# Altium PCB smd_breakout.PcbDoc
Units mm, origin at the board's own origin, x right, y up, seen from the top; angles counter-clockwise.
Board outline 152.4 x 101.6 mm, 2 copper layers (Top Layer, Bottom Layer); 24 components, 0 nets, 106 pads, 0 vias.
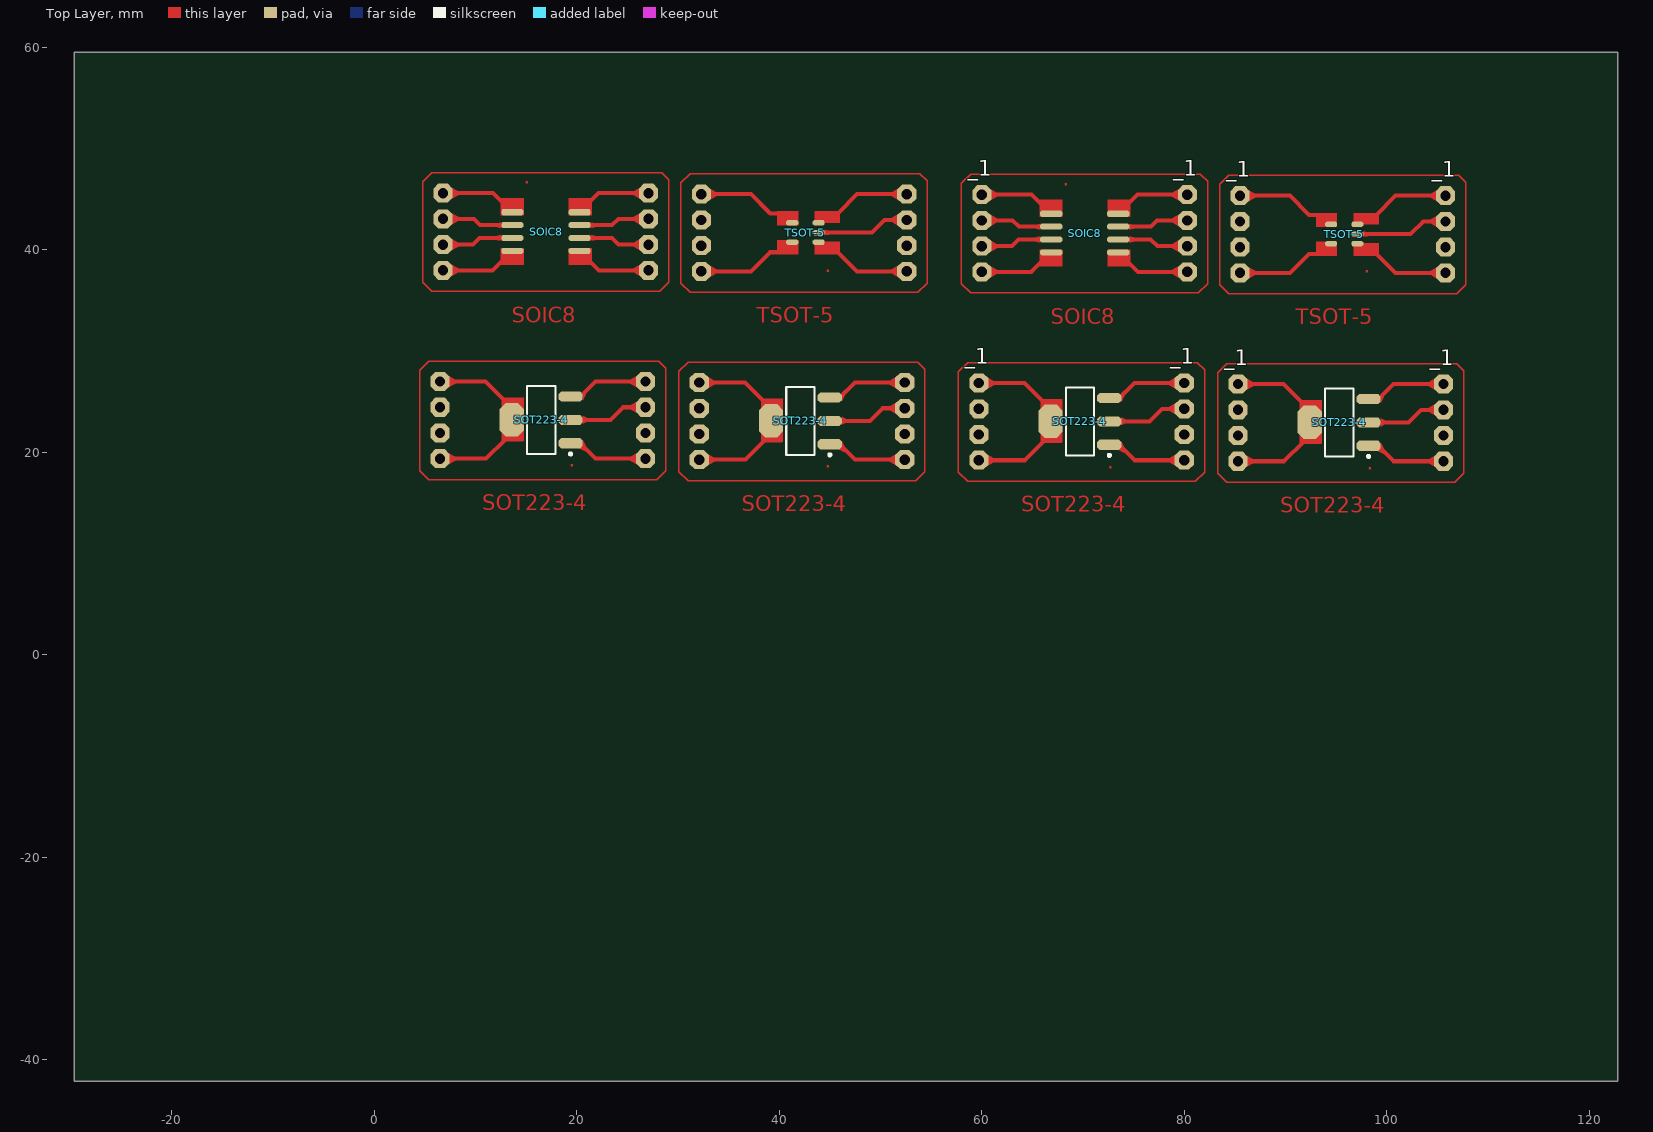
[diagram p0: Top Layer view]
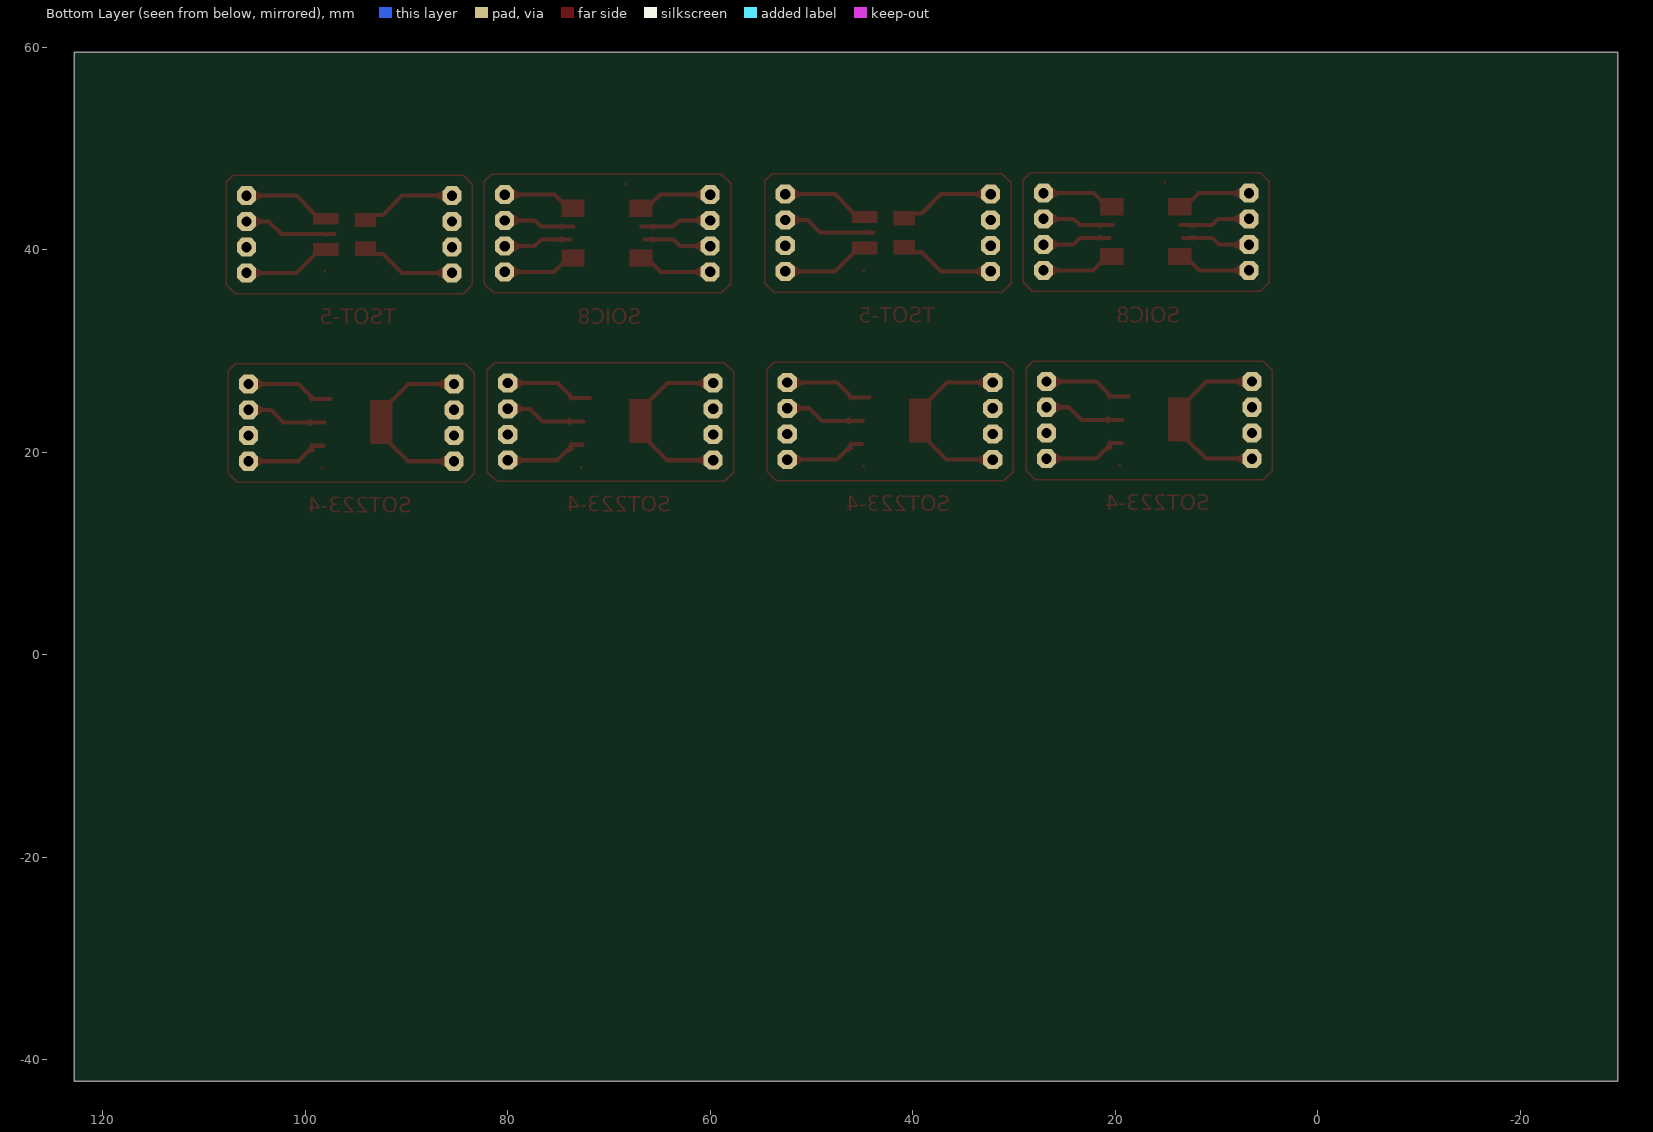
[diagram p1: Bottom Layer view, seen from below]

## Layer stack, top to bottom
Top Solder: solder mask 0.0102, Solder Resist, Dk 3.5
Top Layer: signal copper 0.0356
Dielectric 1: dielectric 0.32, FR-4, Dk 4.8
Bottom Layer: signal copper 0.0356
Bottom Solder: solder mask 0.0102, Solder Resist, Dk 3.5

## Board outline
-29.6,-42.1 122.8,-42.1 122.8,59.5 -29.6,59.5

## Design rules (kind name [scope] priority, off if disabled: settings)
Clearance [All] p1: gap=0.254 ignorepadtopadclearanceinfootprint=FALSE except(0: Arc-Hole Track-Hole SMDPad-Hole THPad-Hole Via-Hole Fill-Hole Poly-Hole Region-Hole Text-Hole)
PolygonConnect [All] p1: connectstyle=Relief reliefconductorwidth=0.254 reliefentries=4 polygonreliefangle="90 Angle" airgapwidth=0.254
RoutingVias [All] p1: holewidth=0.711 width=1.27 viastyle="Through Hole" minholewidth=0.711 minwidth=1.27 maxholewidth=0.711 maxwidth=1.27
SolderMaskExpansion [All] p1: expansion=0.102
Width [All] p1: maxlimit=0.254 minlimit=0.254 preferedwidth=0.254
30 further rules are at their usual default settings.

## Components (designator, comment, footprint, x,y, rotation, side; value= is the part's Value field where it differs from the comment)
_1 "Comment" 1X04 60.01,37.82 r90 top
_1 "Comment" 1X04 80.3,37.82 r90 top
_1 "Comment" 1X04 105.8,37.72 r90 top
_1 "Comment" 1X04 85.51,37.72 r90 top
_1 "Comment" 1X04 59.71,19.22 r90 top
_1 "Comment" 1X04 80,19.22 r90 top
_1 "Comment" 1X04 105.6,19.12 r90 top
_1 "Comment" 1X04 85.31,19.12 r90 top
SOIC8 "Comment" SOIC8_208MIL 70.18,41.65 r270 top
SOIC8 "Comment" SOIC8_208MIL 16.98,41.8 r270 top
SOT223-4 "Comment" SOT223_N 69.7,23.05 r180 top
SOT223-4 "Comment" SOT223_N 95.3,22.95 r180 top
SOT223-4 "Comment" SOT223_N 42.1,23.1 r180 top
SOT223-4 "Comment" SOT223_N 16.5,23.2 r180 top
TSOT-5 "Comment" SOT23-5L 95.8,41.55 r90 top
TSOT-5 "Comment" SOT23-5L 42.6,41.7 r90 top
? "Comment" 1X04 32.11,19.27 r90 top
? "Comment" 1X04 52.4,19.27 r90 top
? "Comment" 1X04 26.8,19.37 r90 top
? "Comment" 1X04 6.51,19.37 r90 top
? "Comment" 1X04 32.31,37.87 r90 top
? "Comment" 1X04 52.6,37.87 r90 top
? "Comment" 1X04 27.1,37.97 r90 top
? "Comment" 1X04 6.81,37.97 r90 top

## Footprints (in the part's own frame and the unit in brackets; to place one, negate y for a bottom-side part, rotate by r counter-clockwise, add the part's x,y. Pads: shape width x height; smd on the part's side, far side on the other; paste and mask are expansions set on the pad)
1X04 [mil]
  oct 74x74 hole 40: 1(0,0) 2(100,0) 3(200,0) 4(300,0)
SOIC8_208MIL [mm]
  oct 0.6x2.2 smd: 1(-1.905,-3.315) 2(-0.635,-3.315) 3(0.635,-3.315) 4(1.905,-3.315) 5(1.905,3.315) 6(0.635,3.315) 7(-0.635,3.315) 8(-1.905,3.315)
SOT23-5L [mm]
  oct 0.55x1.2 smd: 1(-0.95,-1.3) 2(0,-1.3) 3(0.95,-1.3) 4(0.95,1.3) 5(-0.95,1.3)
SOT223_N [mm] "SOT223, 4-Leads, Body 6.5x3.5mm, Pitch 2.3mm, Lead Span 7mm, IPC Medium Density"
  oct 2.4x1 smd: 1(-2.9,2.3) 2(-2.9,0) 3(-2.9,-2.3)
  oct 2.4x3.3 smd: 4(2.9,0)
  silkscreen extent -3.03,-3.35 1.4,3.47, body extent -1.85,-3.35 1.85,3.35, height 1.7

## Nets (pads, with @x,y where several pads share a name; then routed paths per layer and width w, separated by ;. In a path a pad name is that pad's centre, name@x,y a point inside that pad or via, vN(x,y) a via of type N, cw(c..) or ccw(c..) an arc to the next point about the centre after c; other vN are vias at no path point)
pads on no net: ?.1 ?.2 ?.3 ?.4 _1.1 _1.2 _1.3 _1.4 SOIC8.1 SOIC8.2 SOIC8.3 SOIC8.4 SOIC8.5 SOIC8.6 SOIC8.7 SOIC8.8 SOT223-4.1 SOT223-4.2 SOT223-4.3 SOT223-4.4 TSOT-5.1 TSOT-5.2 TSOT-5.3 TSOT-5.4 TSOT-5.5
copper on no net: | length 930.4
  Top Layer w0.128: 4.5,18.2 4.5,28.1 5.4,29 28.1,29 28.8,28.3 28.8,18.2 27.9,17.3 5.4,17.3 4.5,18.2 ; 4.8,36.8 4.8,46.7 5.7,47.6 28.4,47.6 29.1,46.9 29.1,36.8 28.2,35.9 5.7,35.9 4.8,36.8 ; 30.1,18.1 31,17.2 53.5,17.2 54.4,18.1 54.4,28.2 53.7,28.9 31,28.9 30.1,28 30.1,18.1 ; 30.3,36.7 31.2,35.8 53.7,35.8 54.6,36.7 54.6,46.8 53.9,47.5 31.2,47.5 30.3,46.6 30.3,36.7 ; 57.7,18.05 58.6,17.15 81.1,17.15 82,18.05 82,28.15 81.3,28.85 58.6,28.85 57.7,27.95 57.7,18.05 ; 58,36.65 58.9,35.75 81.4,35.75 82.3,36.65 82.3,46.75 81.6,47.45 58.9,47.45 58,46.55 58,36.65 ; 83.3,17.95 83.3,27.85 84.2,28.75 106.9,28.75 107.6,28.05 107.6,17.95 106.7,17.05 84.2,17.05 83.3,17.95 ; 83.5,36.55 83.5,46.45 84.4,47.35 107.1,47.35 107.8,46.65 107.8,36.55 106.9,35.65 84.4,35.65 83.5,36.55
  Top Layer w0.4: 6.51,19.37 11.07,19.37 12.955,21.255 14.595,21.255 ; 6.51,26.99 11.01,26.99 12.9,25.1 14.6,25.1 ; 6.81,37.97 11.69,37.97 13.615,39.895 ; 6.81,40.51 9.77,40.51 10.425,41.165 13.31,41.165 ; 6.81,43.05 9.85,43.05 10.465,42.435 13.615,42.435 ; 6.81,45.59 11.73,45.59 13.615,43.705 ; 18.7,25.5 20.39,25.5 21.88,26.99 26.8,26.99 ; 19.3,23.2 23.35,23.2 24.6,24.45 26.8,24.45 ; 19.4,20.9 20.35,20.9 21.88,19.37 26.8,19.37 ; 20.295,39.895 22.22,37.97 27.1,37.97 ; 20.295,42.435 23.5,42.435 24.115,43.05 27.1,43.05 ; 20.295,43.705 22.18,45.59 27.1,45.59 ; 20.6,41.165 23.485,41.165 24.14,40.51 27.1,40.51 ; 32.11,19.27 36.67,19.27 38.555,21.155 40.195,21.155 ; 32.11,26.89 36.61,26.89 38.5,25 40.2,25 ; 32.31,37.87 37.23,37.87 39.115,39.755 40.395,39.755 ; 32.31,45.49 37.23,45.49 39.12,43.6 40.4,43.6 ; 43.9,41.7 49.15,41.7 50.4,42.95 52.6,42.95 ; 44.3,25.4 45.99,25.4 47.48,26.89 52.4,26.89 ; 44.9,23.1 48.95,23.1 50.2,24.35 52.4,24.35 ; 45,20.8 45.95,20.8 47.48,19.27 52.4,19.27 ; 45.795,39.755 47.68,37.87 52.6,37.87 ; 45.795,43.605 47.68,45.49 52.6,45.49 ; 59.71,19.22 64.27,19.22 66.155,21.105 67.795,21.105 ; 59.71,26.84 64.21,26.84 66.1,24.95 67.8,24.95 ; 60.01,37.82 64.89,37.82 66.815,39.745 ; 60.01,40.36 62.97,40.36 63.625,41.015 66.51,41.015 ; 60.01,42.9 63.05,42.9 63.665,42.285 66.815,42.285 ; 60.01,45.44 64.93,45.44 66.815,43.555 ; 71.9,25.35 73.59,25.35 75.08,26.84 80,26.84 ; 72.5,23.05 76.55,23.05 77.8,24.3 80,24.3 ; 72.6,20.75 73.55,20.75 75.08,19.22 80,19.22 ; 73.495,39.745 75.42,37.82 80.3,37.82 ; 73.495,42.285 76.7,42.285 77.315,42.9 80.3,42.9 ; 73.495,43.555 75.38,45.44 80.3,45.44 ; 73.8,41.015 76.685,41.015 77.34,40.36 80.3,40.36 ; 85.31,19.12 89.87,19.12 91.755,21.005 93.395,21.005 ; 85.31,26.74 89.81,26.74 91.7,24.85 93.4,24.85 ; 85.51,37.72 90.43,37.72 92.315,39.605 93.595,39.605 ; 85.51,45.34 90.43,45.34 92.32,43.45 93.6,43.45 ; 97.1,41.55 102.35,41.55 103.6,42.8 105.8,42.8 ; 97.5,25.25 99.19,25.25 100.68,26.74 105.6,26.74 ; 98.1,22.95 102.15,22.95 103.4,24.2 105.6,24.2 ; 98.2,20.65 99.15,20.65 100.68,19.12 105.6,19.12 ; 98.995,39.605 100.88,37.72 105.8,37.72 ; 98.995,43.455 100.88,45.34 105.8,45.34

## Other copper
Top Layer:
  rectangle: 65.7,43.25 68,44.95
  region: 74.7,44.95 72.4,44.95 72.4,43.25 74.7,43.25
  region: 74.7,40.05 72.4,40.05 72.4,38.35 74.7,38.35
  rectangle: 65.7,38.35 68,40.05
  rectangle: 93,42.25 95.1,43.655
  region: 99.21,40.65 96.7,40.65 96.7,39.405 99.21,39.405
  region: 99.21,43.655 96.7,43.655 96.7,42.5 99.21,42.5
  rectangle: 92.995,39.4 95.095,40.805
  rectangle: 65.8,20.95 67.995,25.25
  rectangle: 91.4,20.85 93.595,25.15
  rectangle: 38.2,21 40.395,25.3
  rectangle: 12.6,21.1 14.795,25.4
  rectangle: 39.795,39.55 41.895,40.955
  region: 46.01,43.805 43.5,43.805 43.5,42.65 46.01,42.65
  region: 46.01,40.8 43.5,40.8 43.5,39.555 46.01,39.555
  rectangle: 39.8,42.4 41.9,43.805
  rectangle: 12.5,38.5 14.8,40.2
  region: 21.5,40.2 19.2,40.2 19.2,38.5 21.5,38.5
  region: 21.5,45.1 19.2,45.1 19.2,43.4 21.5,43.4
  rectangle: 12.5,43.4 14.8,45.1
  text "." at 14.795,46.5 h1.52
  text "." at 67.995,46.3 h1.52
  text "." at 44.5,37.8 h1.52
  text "." at 97.7,37.72 h1.52
  text "." at 19.2,18.6 h1.52
  text "." at 44.5,18.5 h1.52
  text "." at 72.4,18.4 h1.52
  text "." at 98,18.3 h1.52